# EAGLE board Placa_a (EAGLE 3.55)
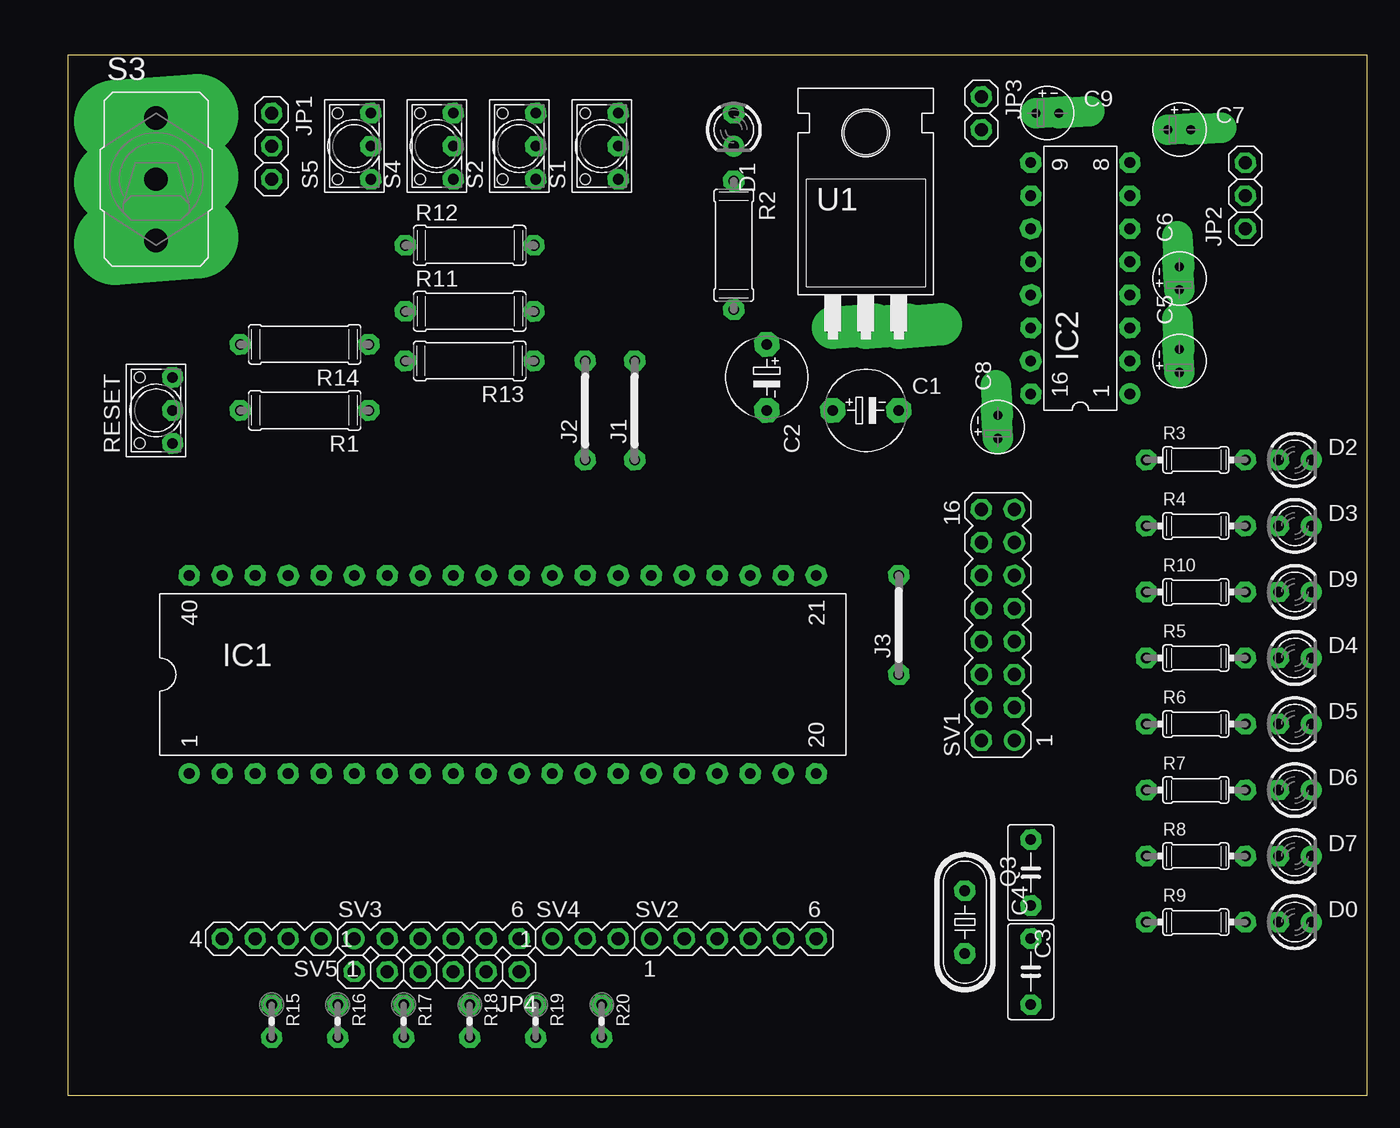
[diagram p0: board, top side]
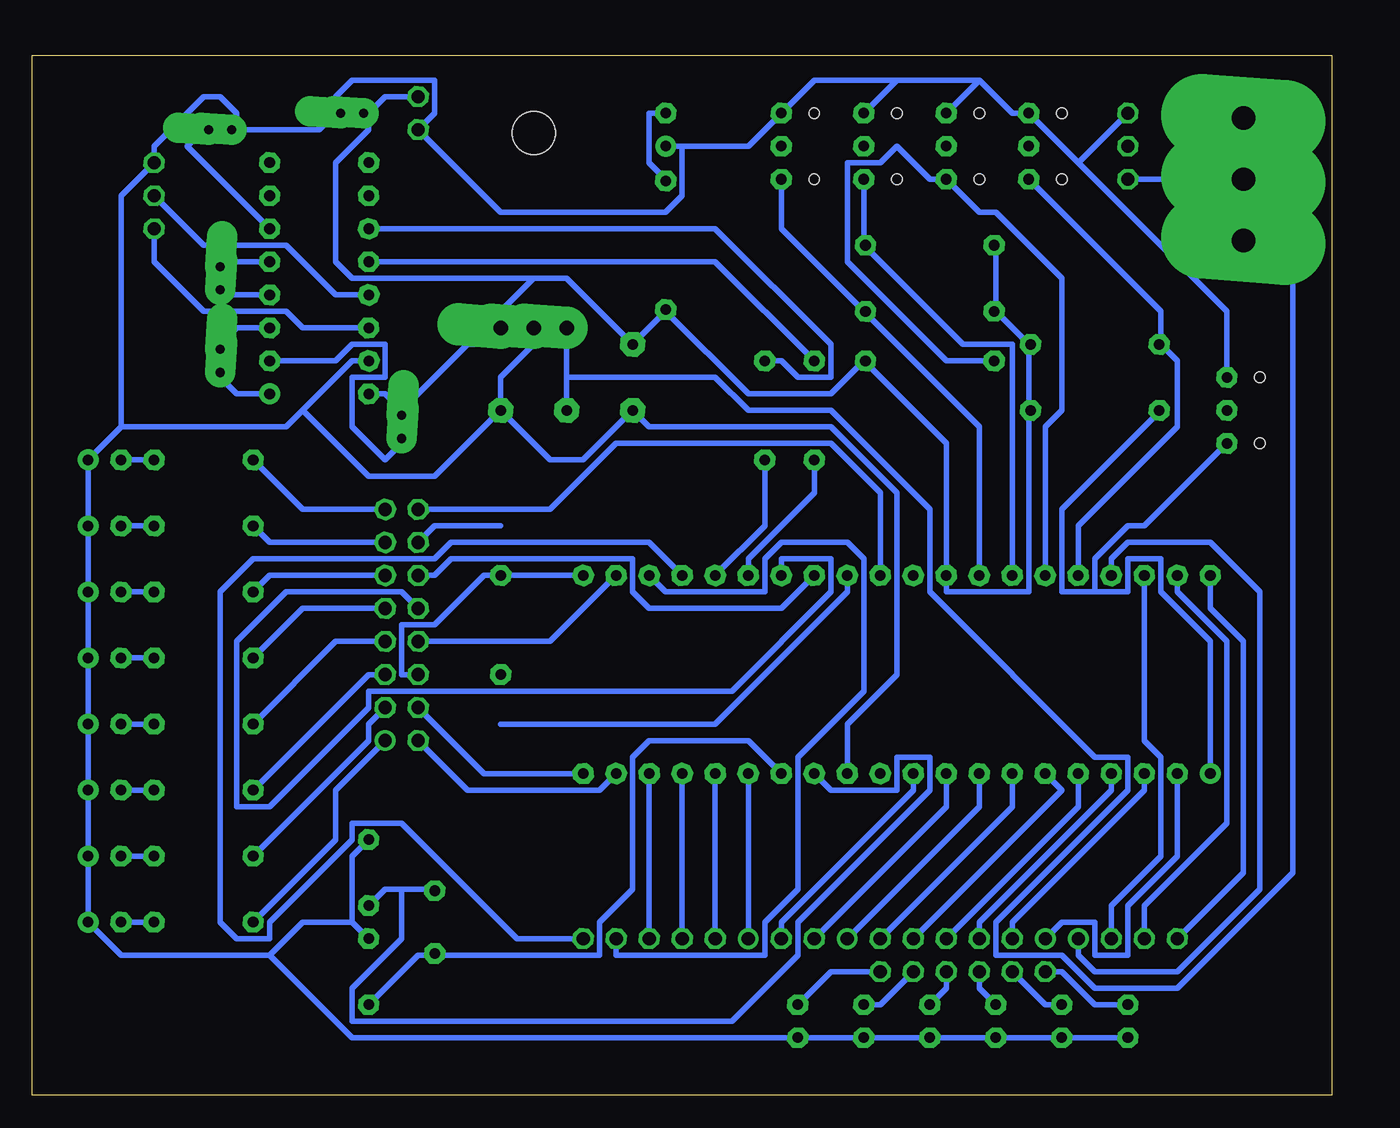
[diagram p1: board, bottom side, seen from below]

Size 100 x 80 mm. Coordinates in mm from the lower left corner, seen from the top.
Outline: 0,0 100,0 100,80 0,80 0,0
Copper layers used: Bottom

## Footprints (pad centres in the part's own frame; a part is rotated, then mirrored left to right if it is on the bottom)
-6 = drill 0.813 pad 1.905 octagon:  -2.54,0;  2.54,0
B3,5 = drill 0.813 pad 1.6 octagon:  -2.54,0;  2.54,0
,6-4 = drill 0.711 pad 2.337 offset:  0.889,0;  -0.889,0
D3 = drill 0.813 pad 1.6 octagon:  -1.27,0 | drill 0.813 pad 1.6 round:  1.27,0
L40 = drill 0.813 pad 1.6 round:  -24.13,-7.62 | drill 0.813 pad 1.6 octagon:  -21.59,-7.62;  -19.05,-7.62;  -16.51,-7.62;  -13.97,-7.62;  -11.43,-7.62;  -8.89,-7.62;  -6.35,-7.62;  -3.81,-7.62;  -1.27,-7.62;  1.27,-7.62;  3.81,-7.62;  6.35,-7.62;  8.89,-7.62;  11.43,-7.62;  13.97,-7.62;  16.51,-7.62;  19.05,-7.62;  21.59,-7.62;  24.13,-7.62;  24.13,7.62;  21.59,7.62;  19.05,7.62;  16.51,7.62;  13.97,7.62;  11.43,7.62;  8.89,7.62;  6.35,7.62;  3.81,7.62;  1.27,7.62;  -1.27,7.62;  -3.81,7.62;  -6.35,7.62;  -8.89,7.62;  -11.43,7.62;  -13.97,7.62;  -16.51,7.62;  -19.05,7.62;  -21.59,7.62;  -24.13,7.62
L16 = drill 0.813 pad 1.6 round:  -8.89,-3.81 | drill 0.813 pad 1.6 octagon:  -6.35,-3.81;  -3.81,-3.81;  -1.27,-3.81;  1.27,-3.81;  3.81,-3.81;  6.35,-3.81;  8.89,-3.81;  8.89,3.81;  6.35,3.81;  3.81,3.81;  1.27,3.81;  -1.27,3.81;  -3.81,3.81;  -6.35,3.81;  -8.89,3.81
 = drill 0.813 pad 1.6 octagon:  -3.81,0;  3.81,0
03 = drill 1.016 pad 1.6 octagon:  -2.54,0;  0,0;  2.54,0
02 = drill 1.016 pad 1.6 octagon:  -1.27,0;  1.27,0
06 = drill 1.016 pad 1.6 octagon:  -6.35,0;  -3.81,0;  -1.27,0;  1.27,0;  3.81,0;  6.35,0
49/S = drill 0.813 pad 1.6 octagon:  -2.413,0;  2.413,0
09/10 = drill 0.813 pad 1.6 octagon:  -4.953,0;  4.953,0
04/7 = drill 0.813 pad 1.6 octagon:  -3.81,0;  3.81,0
04V = drill 0.813 pad 1.6 octagon:  -1.27,0;  1.27,0
50-1 = drill 0.813 pad 1.6 octagon:  0,-1.27;  -2.54,-1.27;  2.54,-1.27 | hole 0.813: 2.54,1.27; -2.54,1.27
040P = drill 1.803 pad 6.35 long:  0,-4.699;  0,0;  0,4.699
08-2 = drill 1.016 pad 1.6 round:  -8.89,-1.27 | drill 1.016 pad 1.6 octagon:  -6.35,-1.27;  -3.81,-1.27;  -1.27,-1.27;  1.27,-1.27;  3.81,-1.27;  -8.89,1.27;  -6.35,1.27;  -3.81,1.27;  -1.27,1.27;  1.27,1.27;  3.81,1.27;  6.35,-1.27;  8.89,-1.27;  6.35,1.27;  8.89,1.27
06-1 = drill 1.016 pad 1.6 round:  -6.35,0 | drill 1.016 pad 1.6 octagon:  -3.81,0;  -1.27,0;  1.27,0;  3.81,0;  6.35,0
03-1 = drill 1.016 pad 1.6 round:  -2.54,0 | drill 1.016 pad 1.6 octagon:  0,0;  2.54,0
04-1 = drill 1.016 pad 1.6 round:  -3.81,0 | drill 1.016 pad 1.6 octagon:  -1.27,0;  1.27,0;  3.81,0
220H = drill 1.118 pad 3.251 offset:  -2.54,-10.16;  0,-10.16;  2.54,-10.16 | hole 3.302: 0,4.826

## Placement (x,y rotation side)
C1  1000UF  [-6]  61.43,52.7 0 top
C2  4,7UF  [-6]  53.81,55.24 270 top
C3  22pf  [B3,5]  74.13,17.14 270 top
C4  22pf  [B3,5]  74.13,9.52 90 top
C5  1UF  [,6-4]  85.56,56.51 90 top
C6  1UF  [,6-4]  85.56,62.86 90 top
C7  1UF  [,6-4]  85.56,74.29 0 top
C8  1UF  [,6-4]  71.59,51.43 90 top
C9  1UF  [,6-4]  75.4,75.56 0 top
D0  LED3  [D3]  94.45,13.33 0 top
D1  ON  [D3]  51.27,74.29 270 top
D2  LED3  [D3]  94.45,48.89 0 top
D3  LED3  [D3]  94.45,43.81 0 top
D4  LED3  [D3]  94.45,33.65 0 top
D5  LED3  [D3]  94.45,28.57 0 top
D6  LED3  [D3]  94.45,23.49 0 top
D7  LED3  [D3]  94.45,18.41 0 top
D9  LED3  [D3]  94.45,38.73 0 top
IC1  16F877  [L40]  33.49,32.38 0 top
IC2  MAX232  [L16]  77.94,62.86 90 top
J1  SER1  []  43.65,52.7 90 top
J2  SER2  []  39.84,52.7 90 top
J3  JD6  []  63.97,36.19 90 top
JP1  FORA  [03]  15.71,73.02 270 top
JP2  SERIAL  [03]  90.64,69.21 90 top
JP3  POWER OUT  [02]  70.32,75.56 270 top
JP4  SENSOR GND  [06]  28.41,9.52 180 top
Q3  4mhz  [49/S]  69.05,13.33 270 top
R1  330  [09/10]  18.25,52.7 180 top
R2  1K  [09/10]  51.27,65.4 270 top
R3  1K  [04/7]  86.83,48.89 0 top
R4  1K  [04/7]  86.83,43.81 0 top
R5  1K  [04/7]  86.83,33.65 0 top
R6  1K  [04/7]  86.83,28.57 0 top
R7  1K  [04/7]  86.83,23.49 0 top
R8  1K  [04/7]  86.83,18.41 0 top
R9  1K  [04/7]  86.83,13.33 0 top
R10  1K  [04/7]  86.83,38.73 0 top
R11  10K  [09/10]  30.95,60.32 0 top
R12  10K  [09/10]  30.95,65.4 0 top
R13  10K  [09/10]  30.95,56.51 180 top
R14  10K  [09/10]  18.25,57.78 180 top
R15  10K  [04V]  15.71,5.71 270 top
R16  10K  [04V]  20.79,5.71 270 top
R17  10K  [04V]  25.87,5.71 270 top
R18  10K  [04V]  30.95,5.71 270 top
R19  10K  [04V]  36.03,5.71 270 top
R20  10K  [04V]  41.11,5.71 270 top
RESET  9450-1  [50-1]  6.82,52.7 90 top
S1  9450-1  [50-1]  41.11,73.02 90 top
S2  9450-1  [50-1]  34.76,73.02 90 top
S3  M9040P  [040P]  6.82,70.48 0 top
S4  9450-1  [50-1]  28.41,73.02 90 top
S5  9450-1  [50-1]  22.06,73.02 90 top
SV1  D[0..7]  [08-2]  71.59,36.19 90 top
SV2  C[0..5]  [06-1]  51.27,12.06 0 top
SV3  A[0..5]  [06-1]  28.41,12.06 0 top
SV4  E[0..2]  [03-1]  39.84,12.06 0 top
SV5  B[4..7]  [04-1]  15.71,12.06 180 top
U1  7805  [220H]  61.43,69.21 0 top

## Library data of the parts
C1 C2 C5-C9 = polcap
C3 C4 = cap
D0 D1-D7 D9 = led
IC1 = pic
IC2 = maxim
J1-J3 = jumper
JP1-JP4 = pinhead
Q3 = quartz
R1-R20 = r
RESET S1 S2 S4 S5 = key
S3 = switch
SV1-SV5 = con-lstb
U1 = linear

## Nets
A0: IC1. SV3.
A1: IC1. SV3.
A2: IC1. SV3.
A3: IC1. SV3.
A4: IC1. SV3.
A5: IC1. SV3.
B4: IC1. SV5.
B5: IC1. SV5.
B6: IC1. SV5.
B7: IC1. SV5.
C0: IC1. SV2.
C1: IC1. SV2.
C2: IC1. SV2.
C3: IC1. SV2.
C4: IC1. SV2.
C5: IC1. SV2.
D0: IC1. SV1.
D1: IC1. SV1.
D2: IC1. SV1.
D3: IC1. SV1.
D4: IC1. SV1.
D5: IC1. SV1.
D6: IC1. J3.
D7: IC1. SV1.
E0: IC1. SV4.
E1: IC1. SV4.
E2: IC1. SV4.
GND: C1. C2. C3. C4. C7. C9. D0. D1. D2. D3. D4. D5. D6. D7. D9. IC1. IC2. JP1. JP2. JP3. R15. R16. R17. R18. R19. R20. RESET. S1. S2. S4. S5. U1.
N$1: C1. S3. U1.
N$2: C3. IC1. Q3.
N$3: C4. IC1. Q3.
N$4: JP1. S3.
N$5: IC1. R1. RESET.
N$6: IC2. JP2.
N$7: IC2. JP2.
N$8: R5. SV1.
N$9: R6. SV1.
N$10: R3. SV1.
N$11: D1. R2.
N$12: C6. IC2.
N$13: C6. IC2.
N$14: C5. IC2.
N$15: C5. IC2.
N$16: C7. IC2.
N$17: R4. SV1.
N$18: C8. IC2.
N$19: R10. SV1.
N$20: R8. SV1.
N$21: JP4. R15.
N$22: R7. SV1.
N$23: JP4. R16.
N$24: R9. SV1.
N$25: D2. R3.
N$26: D3. R4.
N$27: D4. R5.
N$28: D5. R6.
N$29: D6. R7.
N$30: D7. R8.
N$31: D0. R9.
N$32: D9. R10.
N$33: JP4. R17.
N$34: JP4. R18.
N$35: JP4. R19.
N$36: JP4. R20.
N$37: IC2. J1.
N$38: IC2. J2.
N$39: J3. SV1.
S1: IC1. R11. S1.
S2: IC1. R12. S2.
S3: IC1. R13. S4.
S4: IC1. R14. S5.
SERIAL1: IC1. J1.
SERIAL2: IC1. J2.
VCC: C2. C8. C9. IC1. IC2. JP3. R1. R2. R11. R12. R13. R14. U1.
VDD: IC1.
VSS: IC1.

## Tracks (layer width: path | path; a pad name or v marks a point on that pad's centre or on a via)
A0
  Bottom 0.406: 22.06,12.06 20.79,13.33 18.25,13.33 18.25,10.79 15.71,10.79 15.71,14.6 11.9,18.41 11.9,24.76
A1
  Bottom 0.406: 24.6,12.06 24.6,13.33 14.44,23.49 14.44,24.76
A2
  Bottom 0.406: 27.14,12.06 27.14,13.33 16.98,23.49 16.98,24.76
A3
  Bottom 0.406: 19.52,24.76 19.52,22.22 29.68,12.06
A4
  Bottom 0.406: 32.22,12.06 20.79,23.49 22.06,24.76
A5
  Bottom 0.406: 24.6,24.76 24.6,22.22 SV3.
B4
  Bottom 0.406: 19.52,12.06 19.52,10.79 18.25,9.52 11.9,9.52 5.55,15.87 5.55,38.73 9.36,42.54 15.71,42.54 16.98,41.27 16.98,40
B5
  Bottom 0.406: 14.44,40 14.44,27.3 13.17,26.03 13.17,18.41 16.98,14.6 16.98,12.06
B6
  Bottom 0.406: 14.44,12.06 14.44,14.6 8.09,20.95 8.09,34.92 11.9,38.73 11.9,40
B7
  Bottom 0.406: IC1. 9.36,37.46 6.82,34.92 6.82,17.14 SV5.
C0
  Bottom 0.406: 44.92,12.06 44.92,24.76
C1
  Bottom 0.406: 47.46,12.06 47.46,24.76
C2
  Bottom 0.406: 50,12.06 50,24.76
C3
  Bottom 0.406: 52.54,12.06 52.54,24.76
C4
  Bottom 0.406: 52.54,40 51.27,38.73 43.65,38.73 43.65,41.27 42.38,42.54 37.3,42.54 36.03,41.27 36.03,31.11 41.11,26.03 41.11,15.87 43.65,13.33 43.65,10.79 55.08,10.79 55.08,12.06
C5
  Bottom 0.406: SV2. 62.7,12.06 71.59,20.95 75.4,20.95 75.4,19.68 81.75,13.33 81.75,12.06 84.29,12.06 85.56,13.33 85.56,38.73 83.02,41.27 69.05,41.27 67.78,42.54 52.54,42.54 50,40
D0
  Bottom 0.406: 55.08,24.76 56.35,23.49 66.51,23.49 70.32,27.3
D1
  Bottom 0.406: 57.62,24.76 65.24,24.76 70.32,29.84
D2
  Bottom 0.406: 57.62,40 65.24,40 69.05,36.19 71.59,36.19 71.59,32.38 70.32,32.38
D3
  Bottom 0.406: 55.08,40 60.16,34.92 70.32,34.92
D4
  Bottom 0.406: 70.32,37.46 71.59,38.73 80.48,38.73 84.29,34.92 84.29,22.22 81.75,22.22 74.13,29.84 74.13,31.11 46.19,31.11 38.57,38.73 38.57,41.27 42.38,41.27 42.38,40
D5
  Bottom 0.406: 39.84,40 42.38,37.46 52.54,37.46 53.81,38.73 53.81,41.27 67.78,41.27 69.05,40 70.32,40
D6
  Bottom 0.406: 37.3,40 37.3,38.73 47.46,28.57 63.97,28.57
D7
  Bottom 0.406: 34.76,40 34.76,46.35 38.57,50.16 55.08,50.16 60.16,45.08 SV1.
E0
  Bottom 0.406: 27.14,24.76 27.14,22.22 37.3,12.06
E1
  Bottom 0.406: 29.68,24.76 29.68,22.22 39.84,12.06
E2
  Bottom 0.406: 32.22,24.76 32.22,23.49 42.38,13.33 SV4.
GND
  Bottom 0.406: 50,73.02 44.92,73.02 S1. 39.84,78.1 33.49,78.1 | 50,73.02 D1. | RESET. 8.09,60.32 19.52,71.75 | 19.52,71.75 S5. 24.6,75.56 27.14,78.1 | 19.52,71.75 15.71,75.56 | 27.14,78.1 S4. | 33.49,78.1 S2. | 33.49,78.1 27.14,78.1 | C1. 63.97,55.24 61.43,57.78 61.43,59.05 | 37.3,24.76 37.3,28.57 33.49,32.38 33.49,46.35 38.57,51.43 52.54,51.43 C2. 57.62,48.89 60.16,48.89 C1. | 76.67,75.56 76.67,76.83 75.4,78.1 69.05,78.1 69.05,75.56 JP3. 63.97,67.94 51.27,67.94 50,69.21 50,73.02 | 84.29,74.29 77.94,74.29 76.67,75.56 | 76.67,75.56 76.29,75.56 | 74.13,56.51 75.4,56.51 79.21,52.7 | 79.21,52.7 80.48,51.43 93.18,51.43 | 93.18,51.43 D2. D3. D9. D4. D5. D6. D7. D0. 93.18,10.79 81.75,10.79 | 93.18,51.43 93.18,69.21 JP2. 90.64,73.02 86.83,76.83 85.56,76.83 84.29,75.56 84.29,74.29 | 84.29,74.29 C7. | R15. R16. R17. R18. R19. R20. 75.4,4.44 81.75,10.79 | 75.4,13.33 C4. | 75.4,13.33 75.4,18.41 74.13,19.68 | 75.4,13.33 79.21,13.33 81.75,10.79 | C1. 69.05,47.62 74.13,47.62 79.21,52.7
N$1
  Bottom 0.406: 58.89,55.24 58.89,52.7 | 58.89,55.24 58.89,59.05 | 58.89,55.24 47.46,55.24 44.92,52.7 38.57,52.7 30.95,45.08 30.95,38.73 18.25,26.03 15.71,26.03 15.71,23.49 25.87,13.33 25.87,10.79 20.79,10.79 18.25,8.25 11.9,8.25 3.01,17.14 3.01,71.75 5.55,74.29 S3.
N$2
  Bottom 0.406: 71.59,15.87 72.86,15.87 C3. | 71.59,15.87 69.05,15.87 69.05,15.74 | 39.84,24.76 38.57,23.49 33.49,23.49 33.49,26.03 30.95,26.03 30.95,23.49 41.11,13.33 41.11,10.79 46.19,5.71 75.4,5.71 75.4,8.25 71.59,12.06 71.59,15.87
N$3
  Bottom 0.406: 74.13,6.98 70.32,10.79 69.05,10.79 | 42.38,24.76 44.92,27.3 52.54,27.3 53.81,26.03 53.81,15.87 56.35,13.33 56.35,10.79 69.05,10.79 | 69.05,10.79 Q3.
N$4
  Bottom 0.406: 6.82,70.48 JP1.
N$5
  Bottom 0.406: 8.09,50.16 14.44,43.81 15.71,43.81 18.25,41.27 18.25,38.73 | 18.25,38.73 20.79,38.73 20.79,45.08 13.17,52.7 R1. | 9.36,24.76 9.36,34.92 13.17,38.73 13.17,41.27 15.71,41.27 15.71,38.73 18.25,38.73
N$6
  Bottom 0.406: 74.13,61.59 76.67,61.59 80.48,65.4 86.83,65.4 90.64,69.21
N$7
  Bottom 0.406: 74.13,59.05 79.21,59.05 80.48,60.32 86.83,60.32 90.64,64.13 90.64,66.67
N$8
  Bottom 0.406: 72.86,37.46 79.21,37.46 83.02,33.65
N$9
  Bottom 0.406: 72.86,34.92 76.67,34.92 83.02,28.57
N$10
  Bottom 0.406: 72.86,45.08 79.21,45.08 83.02,48.89
N$11
  Bottom 0.406: 51.27,75.56 52.54,75.56 52.54,71.75 51.27,70.48 51.27,70.35
N$12
  Bottom 0.406: 81.75,64.13 85.56,64.13 85.56,63.75
N$13
  Bottom 0.406: 81.75,61.59 85.56,61.59 C6.
N$14
  Bottom 0.406: 81.75,59.05 84.29,59.05 85.56,57.78 85.56,57.4
N$15
  Bottom 0.406: 81.75,53.97 84.29,53.97 85.56,55.24 C5.
N$16
  Bottom 0.406: 81.75,66.67 88.1,73.02 86.83,74.29 86.45,74.29
N$17
  Bottom 0.406: 72.86,42.54 81.75,42.54 83.02,43.81
N$18
  Bottom 0.406: 81.75,56.51 76.67,56.51 75.4,57.78 72.86,57.78 72.86,55.24 75.4,55.24 75.4,51.43 72.86,48.89 71.59,50.16 C8.
N$19
  Bottom 0.406: 72.86,40 81.75,40 83.02,38.73
N$20
  Bottom 0.406: 83.02,18.41 74.13,27.3 74.13,28.57 72.86,29.84
N$21
  Bottom 0.406: 15.71,6.98 18.25,6.98 20.79,9.52 JP4.
N$22
  Bottom 0.406: 72.86,32.38 74.13,32.38 83.02,23.49
N$23
  Bottom 0.406: 20.79,6.98 22.06,6.98 24.6,9.52
N$24
  Bottom 0.406: 83.02,13.33 76.67,19.68 76.67,23.49 72.86,27.3
N$25
  Bottom 0.406: R3. 93.18,48.89
N$26
  Bottom 0.406: R4. 93.18,43.81
N$27
  Bottom 0.406: R5. 93.18,33.65
N$28
  Bottom 0.406: R6. 93.18,28.57
N$29
  Bottom 0.406: R7. 93.18,23.49
N$30
  Bottom 0.406: R8. 93.18,18.41
N$31
  Bottom 0.406: R9. 93.18,13.33
N$32
  Bottom 0.406: R10. 93.18,38.73
N$33
  Bottom 0.406: 25.87,6.98 27.14,8.25 27.14,9.52
N$34
  Bottom 0.406: 30.95,6.98 29.68,8.25 29.68,9.52
N$35
  Bottom 0.406: 32.22,9.52 34.76,6.98 36.03,6.98
N$36
  Bottom 0.406: 41.11,6.98 38.57,9.52 34.76,9.52
N$37
  Bottom 0.406: J1. 42.38,56.51 41.11,55.24 38.57,55.24 38.57,57.78 47.46,66.67 74.13,66.67
N$38
  Bottom 0.406: J2. 47.46,64.13 74.13,64.13
N$39
  Bottom 0.406: 63.97,43.81 69.05,43.81 70.32,42.54
S1
  Bottom 0.406: 27.14,40 27.14,51.43 36.03,60.32 | 42.38,70.48 42.38,66.67 36.03,60.32 | 36.03,60.32 R11.
S2
  Bottom 0.406: 24.6,40 24.6,57.78 28.41,57.78 36.03,65.4 | 36.03,65.4 36.03,70.48 | 36.03,65.4 R12.
S3
  Bottom 0.406: 22.06,40 22.06,51.43 20.79,52.7 20.79,62.86 25.87,67.94 27.14,67.94 29.68,70.48 30.95,70.48 33.49,73.02 34.76,71.75 37.3,71.75 37.3,64.13 29.68,56.51 R13. 25.87,56.51
S4
  Bottom 0.406: 13.17,57.78 13.17,60.32 23.33,70.48 | 19.52,40 19.52,43.81 11.9,51.43 11.9,56.51 13.17,57.78 | 13.17,57.78 R14.
SERIAL1
  Bottom 0.406: 43.65,48.89 43.65,43.81 47.46,40
SERIAL2
  Bottom 0.406: 39.84,48.89 39.84,46.35 44.92,41.27 44.92,40
VCC
  Bottom 0.406: 23.33,52.7 23.33,57.78 | 23.33,57.78 25.87,60.32 | 23.33,57.78 23.2,57.78 | 25.87,60.32 25.87,65.4 26,65.4 | 25.87,60.32 26,60.32 | 36.03,56.51 29.68,50.16 29.68,40 29.68,38.73 23.33,38.73 23.33,52.7 | 23.33,52.7 23.2,52.7 | 70.32,76.83 72.86,76.83 74.13,75.56 | 51.27,60.32 53.81,57.78 58.89,62.86 61.43,62.86 | IC2. 72.86,53.97 71.59,52.7 | 71.59,52.7 66.51,57.78 63.97,57.78 U1. 63.97,60.32 61.43,62.86 | 71.59,52.7 71.59,52.32 | 74.13,75.56 74.13,74.29 76.67,71.75 76.67,64.13 75.4,62.86 61.43,62.86 | 74.13,75.56 C9. | 36.03,56.51 38.57,53.97 44.92,53.97 51.27,60.32 | 36.03,56.51 35.9,56.51 | 51.27,60.32 R2.